# EAGLE board grue (EAGLE 8.6.0)
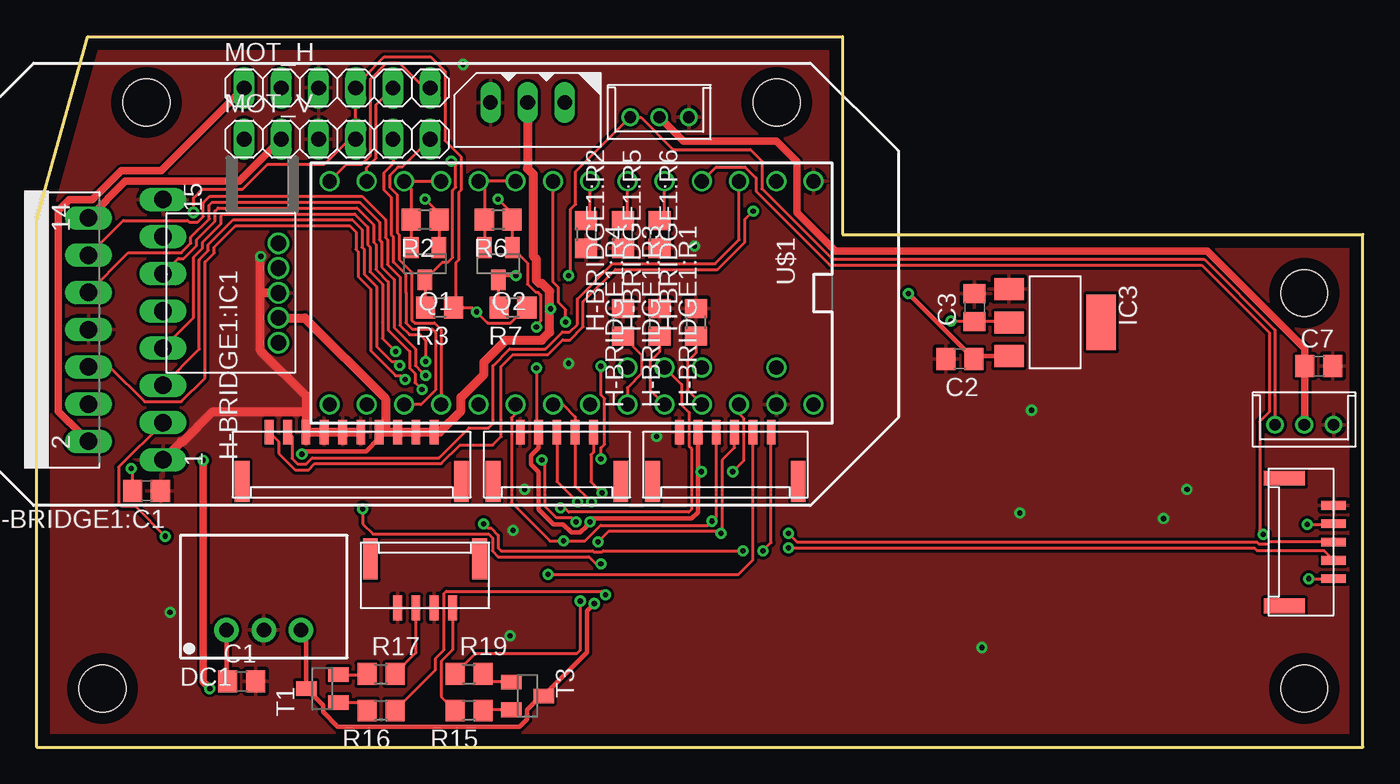
[diagram p0: board, top side]
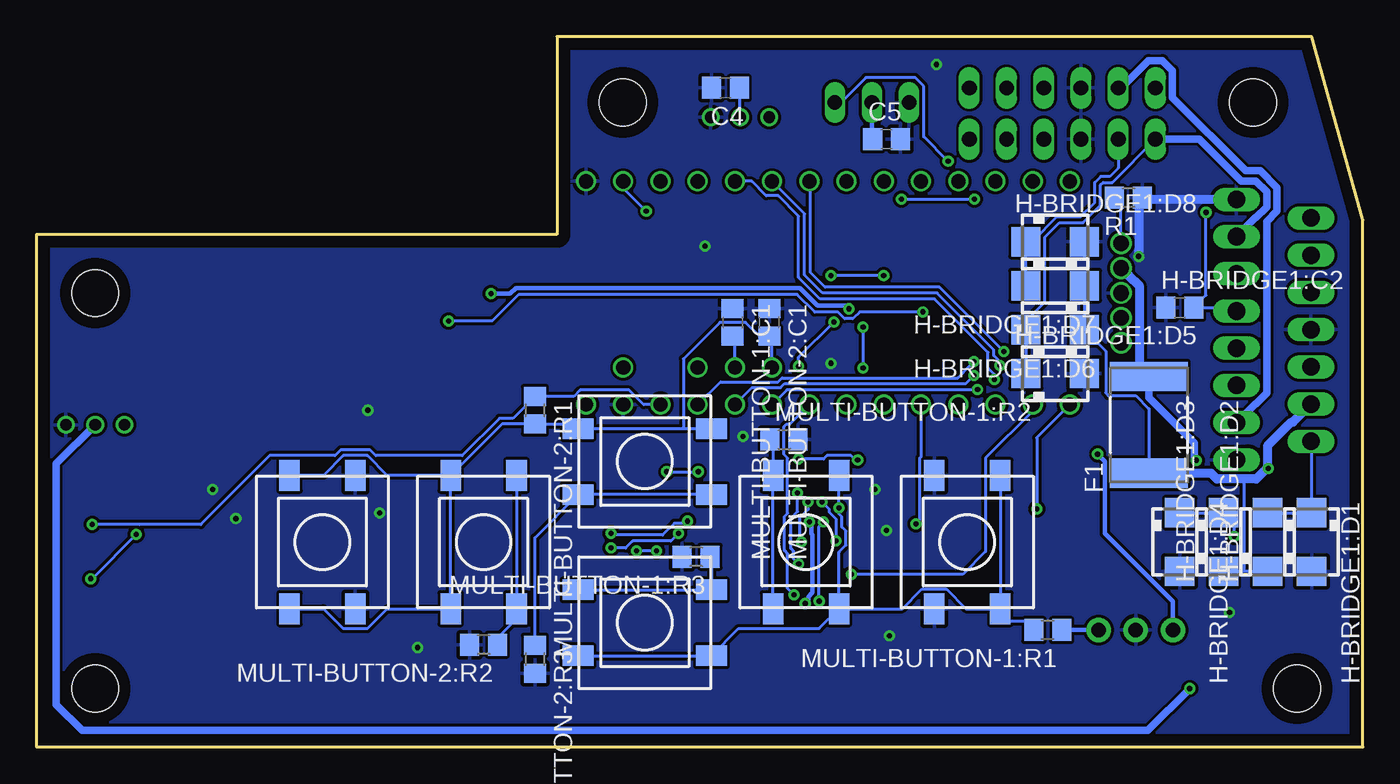
[diagram p1: board, bottom side, seen from below]

Size 90.5 x 48.5 mm. Coordinates in mm from the lower left corner, seen from the top.
Outline: 0,0 90.5,0 90.5,35 55,35 55,48.5 3.5,48.5 0,36 0,0
Copper layers (1*16): Top 0.035mm / dielectric 1.5mm / Bottom 0.035mm
Design rules "sg_default *": minimum track width 0.2mm, minimum drill 0.35mm, track to track 0.2mm, track to pad 0.2mm, pad to pad 0.2mm, via to via 0.2mm, smd to smd 0.2mm, copper to edge 0.8mm, drill to drill 0.2mm, minimum pad ring 0.2mm, minimum via ring 8mil, stop-mask expansion 4mil, vias tented up to drill 1mm, thermal gap 10mil
Holes 3.2 mm at 4.5,4 7.5,44 50.5,44 86.5,4 86.5,31
tKeepout: area 4.5,41 to 10.5,47; area 47.5,41 to 53.5,47; area 1.5,1 to 7.5,7; area 83.5,28 to 89.5,34; area 83.5,1 to 89.5,7
bKeepout: area 3,39.5 to 12,48.5; area 46,39.5 to 55,48.5; area 0,-0.5 to 9,8.5; area 82,-0.5 to 91,8.5; area 82,26.5 to 91,35.5

## Footprints (pad centres in the part's own frame; a part is rotated, then mirrored left to right if it is on the bottom)
DYNAMIXEL_AX_1X03 = drill 1 long: DATA 2.54,0; DYN_VCC 0,0; GND -2.54,0
C0805 = smd 1.3 x 1.5: 1 -0.95,0; 2 0.95,0
SIP3 = drill 1 pad 1.676: 1 -2.54,0; 2 0,0; 3 2.54,0
DC-DC-CONVERTER = drill 1.07 pad 1.47: GND 0,0; ON-OFF -3.4,0; TRIM+ 3.4,0; VIN -1.7,0; VOUT 1.7,0
MF-LSMF300 = smd 2 x 5.3: 1 -3.3,0; 2 3.3,0
GH-10-V = smd 0.6 x 1.7: 1 -5.625,2.5; 2 -4.375,2.5; 3 -3.125,2.5; 4 -1.875,2.5; 5 -0.625,2.5; 6 0.625,2.5; 7 1.875,2.5; 8 3.125,2.5; 9 4.375,2.5; 10 5.625,2.5 | smd 1 x 2.8: CASE0 7.475,-0.85; CASE1 -7.475,-0.85
GH-04-V = smd 0.6 x 1.7: 1 -1.875,2.5; 2 -0.625,2.5; 3 0.625,2.5; 4 1.875,2.5 | smd 1 x 2.8: CASE0 3.725,-0.85; CASE1 -3.725,-0.85
SMA = smd 2 x 2: A 2,0; C -2,0
MULTIWATT-15 = drill 1.2 long: 1 -8.89,-7.62; 2 -7.62,-2.54; 3 -6.35,-7.62; 4 -5.08,-2.54; 5 -3.81,-7.62; 6 -2.54,-2.54; 7 -1.27,-7.62; 8 0,-2.54; 9 1.27,-7.62; 10 2.54,-2.54; 11 3.81,-7.62; 12 5.08,-2.54; 13 6.35,-7.62; 14 7.62,-2.54; 15 8.89,-7.62
R0805 = smd 1.3 x 1.5: 1 -0.95,0; 2 0.95,0
SOT223 = smd 1.499 x 2.007: 1 -2.261,-3.15; 2 0.025,-3.15; 3 2.311,-3.15 | smd 3.81 x 2.007: 4 0,3.15
1X06 = drill 1.016 long: 1 -6.35,0; 2 -3.81,0; 3 -1.27,0; 4 1.27,0; 5 3.81,0; 6 6.35,0
PUSH-BUTTON = smd 1.4 x 2.1: 1 2.25,4.55; 2 2.25,-4.55; 3 -2.25,4.55; 4 -2.25,-4.55
SOT23 = smd 1 x 1.4: 1 -0.95,-1.1; 2 0.95,-1.1; 3 0,1.1
SOT23-BEC = smd 1 x 1.4: B -0.95,-1.1; C 0,1.1; E 0.95,-1.1
GH-05-V = smd 0.6 x 1.7: 1 -2.5,2.5; 2 -1.25,2.5; 3 0,2.5; 4 1.25,2.5; 5 2.5,2.5 | smd 1 x 2.8: CASE0 4.35,-0.85; CASE1 -4.35,-0.85
GH-06-V = smd 0.6 x 1.7: 1 -3.125,2.5; 2 -1.875,2.5; 3 -0.625,2.5; 4 0.625,2.5; 5 1.875,2.5; 6 3.125,2.5 | smd 1 x 2.8: CASE0 4.975,-0.85; CASE1 -4.975,-0.85
TEENSY_3.0-3.2&LC_DIL+4 = drill 0.965: 0 -7.62,13.97; 1 -7.62,11.43; 2 -7.62,8.89; 3 -7.62,6.35; 3.3V 7.62,11.43; 4 -7.62,3.81; 5 -7.62,1.27; 6 -7.62,-1.27; 7 -7.62,-3.81; 8 -7.62,-6.35; 9 -7.62,-8.89; 10 -7.62,-11.43; 11 -7.62,-13.97; 12 -7.62,-16.51; 13 7.62,-16.51; 14/A0 7.62,-13.97; 15/A1 7.62,-11.43; 16/A2 7.62,-8.89; 17/A3 7.62,-6.35; 18/A4 7.62,-3.81; 19/A5 7.62,-1.27; 20/A6 7.62,1.27; 21/A7 7.62,3.81; 22/A8 7.62,6.35; 23/A9 7.62,8.89; A10 5.08,6.35; A11 5.08,3.81; AGND 7.62,13.97; AREF 5.08,8.89; GND -7.62,16.51; VIN 7.62,16.51; VUSB 5.08,13.97
DYNAMIXEL_XL_1X03 = drill 0.8: DATA 2,0; GND -2,0; VCC 0,0

## Placement (x,y rotation side)
AX12_G  DYNAMIXEL-1X03AX  [DYNAMIXEL_AX_1X03]  33.5,44 0 top
C1  10µF  [C0805]  14,4.5 0 top
C2  10µF  [C0805]  63,26.5 180 top
C3  22µF  [C0805]  64,30 90 top
C4  1µF  [C0805]  43.5,45 180 bottom
C5  1µF  [C0805]  32.5,41.5 0 bottom
C7  1µF  [C0805]  87.5,26 0 top
DC1  R-78C3.3-1.0  [SIP3]  15.5,8 0 top
DC-DC-6V  DC-DC-CONVERTER  [DC-DC-CONVERTER]  16.5,31 90 top
F1  MF-LSMF300  [MF-LSMF300]  14.6,22 90 bottom
GRUE  JST-10  [GH-10-V]  21.5,19 0 top
GYRO  JST-04GH-V  [GH-04-V]  26.5,12 180 top
H-BRIDGE1:C1  100nF  [C0805]  7.5,17.5 180 top
H-BRIDGE1:C2  100nF  [C0805]  12.5,30 0 bottom
H-BRIDGE1:D1  S1M  [SMA]  3.5,14 270 bottom
H-BRIDGE1:D2  S1M  [SMA]  6.5,14 90 bottom
H-BRIDGE1:D3  S1M  [SMA]  9.5,14 90 bottom
H-BRIDGE1:D4  S1M  [SMA]  12.5,14 270 bottom
H-BRIDGE1:D5  S1M  [SMA]  21,25.5 0 bottom
H-BRIDGE1:D6  S1M  [SMA]  21,28.5 180 bottom
H-BRIDGE1:D7  S1M  [SMA]  21,31.5 180 bottom
H-BRIDGE1:D8  S1M  [SMA]  21,34.5 0 bottom
H-BRIDGE1:IC1  L298  [MULTIWATT-15]  1,28.5 90 top
H-BRIDGE1:R1  10k  [R0805]  42.5,35 270 top
H-BRIDGE1:R2  10k  [R0805]  40,29 90 top
H-BRIDGE1:R3  10k  [R0805]  40,35 270 top
H-BRIDGE1:R4  10k  [R0805]  37.5,35 270 top
H-BRIDGE1:R5  10k  [R0805]  42.5,29 90 top
H-BRIDGE1:R6  10k  [R0805]  45,29 90 top
IC3  REG1117  [SOT223]  69.5,29 270 top
MOT_H  [1X06]  20.5,45 0 top
MOT_V  [1X06]  20.5,41.5 0 top
MULTI-BUTTON-1:C1  1µF  [C0805]  43,29 270 bottom
MULTI-BUTTON-1:R1  4k7  [R0805]  21.5,8 180 bottom
MULTI-BUTTON-1:R2  2k2  [R0805]  39.5,21 0 bottom
MULTI-BUTTON-1:R3  10k  [R0805]  45.5,13 180 bottom
MULTI-BUTTON-1:U1  PUSH-BUTTON  [PUSH-BUTTON]  49,8.5 270 bottom
MULTI-BUTTON-1:U2  PUSH-BUTTON  [PUSH-BUTTON]  38,14 0 bottom
MULTI-BUTTON-1:U3  PUSH-BUTTON  [PUSH-BUTTON]  27,14 0 bottom
MULTI-BUTTON-2:C1  1µF  [C0805]  40.5,29 270 bottom
MULTI-BUTTON-2:R1  4k7  [R0805]  56.5,23 270 bottom
MULTI-BUTTON-2:R2  2k2  [R0805]  60,7 180 bottom
MULTI-BUTTON-2:R3  10k  [R0805]  56.5,6 270 bottom
MULTI-BUTTON-2:U1  PUSH-BUTTON  [PUSH-BUTTON]  49,19.5 90 bottom
MULTI-BUTTON-2:U2  PUSH-BUTTON  [PUSH-BUTTON]  60,14 180 bottom
MULTI-BUTTON-2:U3  PUSH-BUTTON  [PUSH-BUTTON]  71,14 180 bottom
Q1  BSS138  [SOT23]  26.5,33 180 top
Q2  BSS138  [SOT23]  31.5,33 180 top
R1  220  [R0805]  16,37.5 180 bottom
R2  10k  [R0805]  26.5,36 180 top
R3  10k  [R0805]  27.5,30 180 top
R6  10k  [R0805]  31.5,36 180 top
R7  10k  [R0805]  32.5,30 180 top
R15  0  [R0805]  29.5,2.5 180 top
R16  270  [R0805]  23.5,2.5 180 top
R17  0  [R0805]  23.5,5 0 top
R19  270  [R0805]  29.5,5 0 top
T1  [SOT23-BEC]  19.5,4 90 top
T3  [SOT23-BEC]  33.5,3.5 270 top
TOF_LP_D_AND_DISPLAY  JST-05  [GH-05-V]  35.5,19 0 top
TOF_LP_G  JST-05  [GH-05-V]  86,14 270 top
TOF_PINCE  JST-06  [GH-06-V]  47,19 0 top
U$1  TEENSY_3.1-3.2_DIL+4  [TEENSY_3.0-3.2&LC_DIL+4]  36.5,31 270 top
XL320_G  DYNAMIXEL-1X03XL  [DYNAMIXEL_XL_1X03]  86.5,22 180 top
XL320_G1  DYNAMIXEL-1X03XL  [DYNAMIXEL_XL_1X03]  42.5,43 180 top

## Library data of the parts
AX12_G XL320_G XL320_G1 = 1NTech_pinhead
C1-C5 C7 H-BRIDGE1:C1 H-BRIDGE1:C2 H-BRIDGE1:R1-H-BRIDGE1:R6 MULTI-BUTTON-1:C1 MULTI-BUTTON-1:R1-MULTI-BUTTON-1:R3 MULTI-BUTTON-2:C1 MULTI-BUTTON-2:R1-MULTI-BUTTON-2:R3 R1-R3 R6 R7 R15-R17 R19 = resistor
DC1 = dc-dc-converter
DC-DC-6V = dc-dc-converter-6v; RS: 715-8575
F1 = polyswitch; RS: 817-1652
GRUE GYRO TOF_LP_D_AND_DISPLAY TOF_LP_G TOF_PINCE = con-jst
H-BRIDGE1:D1-H-BRIDGE1:D8 = diode; RS: 872-2874
H-BRIDGE1:IC1 = st-microelectronics; MPN: L298N; OC_FARNELL: 1589425; OC_NEWARK: 32M1527
IC3 = burr-brown; MPN: REG1117; OC_FARNELL: 1097566; OC_NEWARK: 14P6981; RS: 885-5432
MOT_H MOT_V = pinhead
MULTI-BUTTON-1:U1-MULTI-BUTTON-1:U3 MULTI-BUTTON-2:U1-MULTI-BUTTON-2:U3 = push-button; H: 4.3mm; RS: 479-1491
Q1 Q2 = transistor-small-signal
T1 T3 = transistor; RS: 781-4272
U$1 = Teensy_libSG

## Nets
+3V3: DC1.3 MULTI-BUTTON-1:R1.1 MULTI-BUTTON-2:R1.1 Q1.1 Q2.1 R2.1 R6.1 T1.C T3.C TOF_LP_D_AND_DISPLAY.2 TOF_LP_G.2 TOF_PINCE.2 U$1.3.3V
+5V: C3.1 H-BRIDGE1:C2.2 H-BRIDGE1:IC1.9 IC3.2 MOT_H.4 MOT_V.4 R3.1 R7.1
+6V: C4.1 C7.1 DC-DC-6V.VOUT F1.2 XL320_G1.VCC XL320_G.VCC
+12V: AX12_G.DYN_VCC C1.1 C2.1 C5.1 DC1.1 DC-DC-6V.VIN GRUE.7 GRUE.8 GRUE.9 GRUE.10 IC3.3
AREF: U$1.AREF
DEL_GYRO_1: GYRO.1 R15.2
DEL_GYRO_1_PWM: R19.1 U$1.6
DEL_GYRO_2: GYRO.3 R17.2
DEL_GYRO_2_PWM: R16.1 U$1.20/A6
GND: AX12_G.GND C1.2 C2.2 C3.2 C4.2 C5.2 C7.2 DC1.2 DC-DC-6V.GND GRUE.3 GRUE.4 GRUE.5 GRUE.6 GYRO.2 GYRO.4 H-BRIDGE1:C1.1 H-BRIDGE1:C2.1 H-BRIDGE1:D1.A H-BRIDGE1:D4.A H-BRIDGE1:D5.A H-BRIDGE1:D8.A H-BRIDGE1:IC1.1 H-BRIDGE1:IC1.8 H-BRIDGE1:IC1.15 H-BRIDGE1:R1.2 H-BRIDGE1:R2.2 H-BRIDGE1:R3.2 H-BRIDGE1:R4.2 H-BRIDGE1:R5.2 H-BRIDGE1:R6.2 IC3.1 MOT_H.3 MOT_V.3 MULTI-BUTTON-1:C1.1 MULTI-BUTTON-1:R2.2 MULTI-BUTTON-1:R3.2 MULTI-BUTTON-1:U3.3 MULTI-BUTTON-1:U3.4 MULTI-BUTTON-2:C1.1 MULTI-BUTTON-2:R2.2 MULTI-BUTTON-2:R3.2 MULTI-BUTTON-2:U3.3 MULTI-BUTTON-2:U3.4 R1.1 TOF_LP_D_AND_DISPLAY.1 TOF_LP_G.1 TOF_PINCE.1 U$1.AGND U$1.GND XL320_G1.GND XL320_G.GND
GRUE_SERIAL_MISO: GRUE.2 U$1.1
GRUE_SERIAL_MOSI: GRUE.1 U$1.0
MOT_H_EN: H-BRIDGE1:IC1.6 H-BRIDGE1:R1.1 U$1.3
MOT_H_ENC_A: MOT_H.5 U$1.11
MOT_H_ENC_B: MOT_H.6 U$1.12
MOT_H_IN1: H-BRIDGE1:IC1.5 H-BRIDGE1:R3.1 U$1.4
MOT_H_IN2: H-BRIDGE1:IC1.7 H-BRIDGE1:R4.1 U$1.5
MOT_H_OUT+: H-BRIDGE1:D1.C H-BRIDGE1:D2.A H-BRIDGE1:IC1.2 MOT_H.1
MOT_H_OUT-: H-BRIDGE1:D3.A H-BRIDGE1:D4.C H-BRIDGE1:IC1.3 MOT_H.2
MOT_V_EN: H-BRIDGE1:IC1.11 H-BRIDGE1:R2.1 U$1.21/A7
MOT_V_ENC_A: MOT_V.5 U$1.15/A1
MOT_V_ENC_B: MOT_V.6 U$1.16/A2
MOT_V_IN1: H-BRIDGE1:IC1.10 H-BRIDGE1:R5.1 U$1.22/A8
MOT_V_IN2: H-BRIDGE1:IC1.12 H-BRIDGE1:R6.1 U$1.23/A9
MOT_V_OUT+: H-BRIDGE1:D5.C H-BRIDGE1:D6.A H-BRIDGE1:IC1.13 MOT_V.1
MOT_V_OUT-: H-BRIDGE1:D7.A H-BRIDGE1:D8.C H-BRIDGE1:IC1.14 MOT_V.2
MULTI-BUTTON-1:N$3: MULTI-BUTTON-1:R2.1 MULTI-BUTTON-1:U2.3 MULTI-BUTTON-1:U2.4
MULTI-BUTTON-1:N$4: MULTI-BUTTON-1:R3.1 MULTI-BUTTON-1:U1.3 MULTI-BUTTON-1:U1.4
MULTI-BUTTON-2:N$3: MULTI-BUTTON-2:R2.1 MULTI-BUTTON-2:U2.3 MULTI-BUTTON-2:U2.4
MULTI-BUTTON-2:N$4: MULTI-BUTTON-2:R3.1 MULTI-BUTTON-2:U1.3 MULTI-BUTTON-2:U1.4
N$1: MULTI-BUTTON-1:C1.2 MULTI-BUTTON-1:R1.2 MULTI-BUTTON-1:U1.1 MULTI-BUTTON-1:U1.2 MULTI-BUTTON-1:U2.1 MULTI-BUTTON-1:U2.2 MULTI-BUTTON-1:U3.1 MULTI-BUTTON-1:U3.2 U$1.A10
N$2: MULTI-BUTTON-2:C1.2 MULTI-BUTTON-2:R1.2 MULTI-BUTTON-2:U1.1 MULTI-BUTTON-2:U1.2 MULTI-BUTTON-2:U2.1 MULTI-BUTTON-2:U2.2 MULTI-BUTTON-2:U3.1 MULTI-BUTTON-2:U3.2 U$1.A11
N$3: DC-DC-6V.TRIM+ R1.2
N$4: F1.1 H-BRIDGE1:C1.2 H-BRIDGE1:D2.C H-BRIDGE1:D3.C H-BRIDGE1:D6.C H-BRIDGE1:D7.C H-BRIDGE1:IC1.4
N$17: R15.1 T3.E
N$18: R19.2 T3.B
N$21: R17.1 T1.E
N$22: R16.2 T1.B
SCL: TOF_LP_D_AND_DISPLAY.4 TOF_LP_G.4 TOF_PINCE.4 U$1.19/A5
SDA: TOF_LP_D_AND_DISPLAY.3 TOF_LP_G.3 TOF_PINCE.3 U$1.18/A4
SERIAL_AX12: Q1.2 R2.2 U$1.9 U$1.10
SERIAL_AX12_5V: AX12_G.DATA Q1.3 R3.2
SERIAL_XL320: Q2.2 R6.2 U$1.7 U$1.8
SERIAL_XL320_5V: Q2.3 R7.2 XL320_G1.DATA XL320_G.DATA
TOF_LP_D: TOF_LP_D_AND_DISPLAY.5 U$1.13
TOF_LP_G: TOF_LP_G.5 U$1.2
TOF_PINCE_EXT: TOF_PINCE.6 U$1.17/A3
TOF_PINCE_INT: TOF_PINCE.5 U$1.14/A0
VIN: U$1.VIN
VUSB: U$1.VUSB

## Tracks (layer width: path | path; a pad name or v marks a point on that pad's centre or on a via)
+3V3  (via drill 0.35)
  Top 0.2: Q1.1 R2.1 27.45,36.45 v26.5,37.4 | U$1.3.3V 47.93,22.77 48.23,22.47 48.23,19.52 v47.5,18.8 | 45.12,19.57 45.12,19.6 | v86.7,15.2 88.45,15.2 TOF_LP_G.2 | v34.1,28.67 34.1,28.8 34.4,29.1 34.4,30.87 34.22,31.05 34.05,31.05 33.5,31.6 33.5,33.05 Q2.1 R6.1 32.45,36.45 v31.5,37.4 | v34.1,25.89 34.1,21.65 TOF_LP_D_AND_DISPLAY.2 | v45.35,18.8 45.12,18.8
  Top 0.3: DC1.3 18.4,7.64 T1.C 19.55,2.85 19.55,2.4 20.55,1.4 32.95,1.4 33.45,1.91 33.45,2.55 34.5,3.6 | 34.5,3.6 T3.C 37.56,6.46 37.56,9.3 v38.06,9.8 | 34.5,3.6 34.25,3.85 | TOF_PINCE.2 45.12,19.6 45.12,18.8 45.12,16.02 44.7,15.6 37.98,15.6 v37.75,15.37 37.52,15.14 37.52,15.07 37.1,14.64 36.49,14.64 35.94,15.2 35.28,15.2 34.25,16.23 34.25,18.79 33.74,19.3 33.74,19.9 34.25,20.41 TOF_LP_D_AND_DISPLAY.2
  Bottom 0.2: U$1.3.3V 49.08,23.38 50.06,24.36 53.42,24.36 53.83,23.95 MULTI-BUTTON-2:R1.1 58,22.45 58.92,22.45 61.47,19.9 67.36,19.9 67.76,20.3 69.74,20.3 70.14,19.9 74.6,19.9 79.3,15.2 83.5,15.2 v86.7,15.2 | v34.1,28.67 v34.1,25.89 | v31.5,37.4 v26.5,37.4 | v47.5,18.8 v45.35,18.8
  Bottom 0.3: DC1.3 MULTI-BUTTON-1:R1.1 | v38.06,9.8 37.83,10.03 37.83,10.27 37.55,10.55 37.55,14.49 37.63,14.57 37.63,15.25 v37.75,15.37
+5V  (via drill 0.35)
  Top 0.2: R3.1 28.7,30 | 28.7,30 29.73,30 v30.01,29.71 30.78,28.95 32.32,28.95 33.37,30 R7.1 | v10.7,36.51 10.7,37.49 11.3,38.09 14.06,38.09 15.75,39.78 19.65,39.78 21.36,41.5 MOT_V.4 MOT_H.4 22.38,45.61 22.38,45.77 23.73,47.12 26.87,47.12 27.86,46.13 27.86,41.4 28.99,40.27 28.99,38.05 28.8,37.85 28.8,33.26 28.59,33.05 28.59,30.11 28.7,30 | IC3.2 66.28,29.05 C3.1 63.96,29.09 v62.39,29.09
  Bottom 0.2: H-BRIDGE1:IC1.9 8.85,30 H-BRIDGE1:C2.2 10.7,30.85 v10.7,36.51 | v30.01,29.71 34.33,29.71 34.8,29.24 35.36,29.24 35.82,29.7 37.4,29.7 38.6,30.9 57.6,30.9 59.41,29.09 v62.39,29.09
+6V  (via drill 0.35)
  Top 0.5: XL320_G1.VCC 44.15,41.35 50.5,41.35 51.88,39.97 51.88,36.5 54.52,33.85 79.9,33.85 86.55,27.2 C7.1 86.55,22.05 XL320_G.VCC | v11.37,19.58 11.37,4.45 v11.82,4
  Bottom 0.2: XL320_G1.VCC 42.5,44.95 C4.1
  Bottom 0.5: F1.2 14.6,23.88 11.5,20.78 11.5,19.71 v11.37,19.58 | v11.82,4 14.67,1.15 87.4,1.15 89.15,2.9 89.15,19.35 XL320_G.VCC
  Bottom 0.61: DC-DC-6V.VOUT 16.04,32.24 15.99,32.24 15.26,31.51 15.26,25.96 F1.2
+12V  (via drill 0.35)
  Top 0.3: IC3.3 64.14,26.69 C2.1 v59.49,30.96 | DC1.1 12.96,4.59 C1.1 | 35.01,30 v35.08,29.93 v35.08,29.92 | GRUE.7 23.38,21.11 22.47,20.2 18.3,20.2 v18.1,20
  Top 0.61: GRUE.7 23.8,21.5 | 23.8,21.5 GRUE.8 GRUE.9 GRUE.10 27.5,21.5 28.96,22.96 28.96,23.87 30.53,25.44 30.53,26.28 32.03,27.79 34.47,27.79 35.01,28.33 35.01,30 35.01,31.12 34.48,31.66 34.31,31.66 34.1,31.86 34.1,33.3 33.88,33.53 33.88,39.11 33.5,39.49 AX12_G.DYN_VCC | DC-DC-6V.VIN 18.29,29.3 23.8,23.79 23.8,21.5
  Bottom 0.3: AX12_G.DYN_VCC 33.5,41.55 C5.1 | v35.08,29.92 35.31,30.15 37.22,30.15 38.42,31.35 57.79,31.35 58.19,30.95 v59.48,30.95 v59.49,30.96 | v18.1,20 17.6,19.5 17.6,14.61 12.96,9.96 DC1.1
DEL_GYRO_1
  Top 0.2: GYRO.1 28.38,6.65 27.6,5.87 27.6,3.45 R15.2
DEL_GYRO_1_PWM  (via drill 0.35)
  Top 0.2: R19.1 29.95,6.4 36.86,6.4 37.11,6.64 v37.11,9.96 v37.1,9.97 | U$1.6 35.23,31.75 35.61,31.38 35.61,30.35 36.1,29.86 v36.1,29.02 | v36.8,15.37 36.52,15.65 35.47,15.65 34.7,16.42 34.7,19.37 v34.47,19.6 | v38.5,19.67 38.5,20.43 38.75,20.68 38.75,23.79 38.5,24.04 v38.5,26
  Bottom 0.2: v36.8,15.37 37.07,15.09 37.1,15.06 v37.1,9.97 | v34.47,19.6 34.63,19.6 34.93,19.9 36.57,19.9 36.8,19.67 v38.5,19.67 | v38.5,26 38.5,26.62 v36.1,29.02
DEL_GYRO_2
  Top 0.2: GYRO.3 25.88,6.42 R17.2
DEL_GYRO_2_PWM  (via drill 0.35)
  Top 0.2: R16.1 27.2,5.25 27.2,6.04 27.77,6.62 27.77,10.47 27.95,10.65 38.58,10.65 v38.83,10.4
  Bottom 0.2: U$1.20/A6 39.1,22.05 39.32,22.05 39.5,21.87 39.5,19.97 39.25,19.72 39.25,15.96 39.47,15.74 39.47,13.43 39.25,13.21 39.25,10.82 v38.83,10.4
GND  (via drill 0.35)
  Top 0.61: 18.38,22.9 18.38,23.97 15.26,27.09 15.26,31 | 18.38,22.9 GRUE.3 GRUE.4 GRUE.5 GRUE.6 | H-BRIDGE1:IC1.1 9.86,20.84 9.96,20.84 12.02,22.9 18.38,22.9 | DC-DC-6V.GND 15.26,31 | 15.26,31 15.26,33.46 v15.3,33.5
  Bottom 0.61: v15.3,33.5 15.3,33.85 15.26,33.89 15.26,37.29 R1.1 14.94,37.39 H-BRIDGE1:IC1.15
  other vias: 44.9,34.2 32.3,7.6 67.9,23 64.5,6.8 67.1,16 29.1,46.6 76.9,15.6 78.5,17.6 33.3,17.6 32.5,14.8 42.3,21.2 36.3,26.2 9.1,9.2
  pour Top: 0,48.5 90.5,48.5 90.5,0 0,0
  pour Bottom: 0,48.5 90.5,48.5 90.5,0 0,0
GRUE_SERIAL_MISO
  Top 0.2: GRUE.2 17.42,21.2 17.42,19.72 17.82,19.32 18.38,19.32 18.81,19.75 27.45,19.75 29.5,21.8 30.83,21.8 31.13,22.1 31.13,26.03 32.28,27.18 34.72,27.18 35.88,28.34 36.38,28.34 36.9,28.86 36.9,30.6 39.3,33 46.3,33 47.93,34.63 U$1.1
GRUE_SERIAL_MOSI  (via drill 0.35)
  Top 0.2: GRUE.1 16.52,20.85 16.52,20.05 17.65,18.92 18.55,18.92 18.98,19.35 27.62,19.35 28.88,20.62 31.12,20.62 31.7,21.2 31.7,25.98 32.5,26.78 34.88,26.78 35.9,27.8 36.4,27.8 37.3,28.7 37.3,30.4 39.5,32.6 46.47,32.6 48.33,34.46 48.33,36.03 v48.9,36.6
  Bottom 0.2: v48.9,36.6 50.47,38.17 U$1.0
MOT_H_EN  (via drill 0.35)
  Top 0.2: H-BRIDGE1:R1.1 42.85,36.3 U$1.3 | H-BRIDGE1:IC1.6 4.99,25.96 7.36,23.59 9.88,23.59 11.5,25.21 11.5,33.11 12.12,33.73 12.12,34.14 13.58,35.6 21.37,35.6 21.8,35.17 21.8,33.97 21.95,33.82 21.95,32.12 22.8,31.27 22.8,27.06 24.49,25.37 24.86,25.37 v25.14,25.09
  Bottom 0.2: v25.14,25.09 25.14,25.45 25.58,25.89 25.58,26.95 29.23,30.6 37.03,30.6 38.5,32.07 38.5,36.24 39.89,37.64 40.72,37.64 41.7,38.62 U$1.3
MOT_H_ENC_A
  Top 0.2: U$1.11 22.53,39.56 23.18,40.21 23.18,43.87 MOT_H.5
MOT_H_ENC_B
  Top 0.2: U$1.12 21.15,39.78 22.19,39.78 22.78,40.37 22.78,41.6 22.78,41.8 22.78,45.6 23.89,46.72 24.73,46.72 26.44,45 MOT_H.6
MOT_H_IN1  (via drill 0.35)
  Top 0.2: H-BRIDGE1:R3.1 40.31,36.26 U$1.4 | H-BRIDGE1:IC1.5 11.1,27.17 11.1,33.28 11.72,33.9 11.72,34.3 13.41,36 21.54,36 22.2,35.34 22.2,34.13 22.35,33.98 22.35,32.28 23.2,31.43 23.2,27.34 24.22,26.32 24.5,26.32 v24.77,26.05
  Bottom 0.2: v24.77,26.05 24.77,26.32 25.18,26.72 25.18,27.11 29.07,31 36.87,31 38.1,32.23 38.1,36.41 U$1.4
MOT_H_IN2  (via drill 0.35)
  Top 0.2: H-BRIDGE1:R4.1 37.77,36.22 U$1.5 | H-BRIDGE1:IC1.7 10.7,29.31 10.7,33.44 11.32,34.06 11.32,34.47 12.58,35.73 12.58,36.28 12.7,36.4 21.7,36.4 22.6,35.5 22.6,34.3 22.75,34.15 22.75,32.45 23.6,31.6 23.6,29 23.6,27.9 v24.5,27
  Bottom 0.2: v24.5,27 28.9,31.4 36.7,31.4 37.7,32.4 37.7,38.55 U$1.5
MOT_H_OUT+
  Top 0.5: MOT_H.1 8.49,39.34 5.77,39.34 3.8,37.37 2.22,37.37 1.49,36.64 1.49,22.9 2.22,22.17 2.25,22.17 H-BRIDGE1:IC1.2
  Bottom 0.2: H-BRIDGE1:D2.A H-BRIDGE1:D1.C 3.5,20.84 H-BRIDGE1:IC1.2
MOT_H_OUT-  (via drill 0.35)
  Top 0.2: H-BRIDGE1:IC1.3 8.62,22.13 5.6,19.11 5.6,16.63 5.78,16.45 6.73,16.45 v8.78,14.4
  Bottom 0.2: H-BRIDGE1:D4.C H-BRIDGE1:D3.A 8.78,15.28 v8.78,14.4
  Bottom 0.5: MOT_H.2 16.5,45 14.63,46.87 13.67,46.87 12.99,46.19 12.99,44.33 8,39.34 7.01,39.34 5.87,38.2 5.87,36.58 6.57,35.88 6.57,24.17 7.3,23.44 7.33,23.44 H-BRIDGE1:IC1.3
MOT_V_EN  (via drill 0.35)
  Top 0.2: U$1.21/A7 40.31,24.53 41.29,25.51 41.29,26.76 H-BRIDGE1:R2.1 | H-BRIDGE1:IC1.11 9.66,33.35 10.04,33.35 10.92,34.23 10.92,34.64 12.18,35.9 12.18,36.6 12.38,36.8 21.87,36.8 23,35.67 23,34.46 23.15,34.31 23.15,32.61 24,31.76 24,28.46 25.45,27.01 25.45,25.88 25.82,25.52 25.82,24.89 v26.29,24.41
  Bottom 0.2: U$1.21/A7 39.3,24.39 | 39.3,24.39 39.3,24.4 | 39.3,24.39 39.28,24.41 v26.29,24.41
MOT_V_ENC_A
  Top 0.2: MOT_V.5 24.31,39.81 23.69,39.19 23.69,38.05 24.2,37.53 24.2,34.96 24.35,34.81 24.35,33.11 25.2,32.26 25.2,31.04 25.2,31 25.2,28.96 25.61,28.55 26.98,28.55 27.21,28.32 27.21,24.37 26.22,23.38 U$1.15/A1
MOT_V_ENC_B
  Top 0.2: MOT_V.6 24.95,39.6 24.66,39.6 24.09,39.03 24.09,38.21 24.6,37.7 24.6,35.13 24.75,34.98 24.75,33.28 25.6,32.43 25.6,29.13 25.78,28.95 27.15,28.95 27.61,28.49 U$1.16/A2
MOT_V_IN1  (via drill 0.35)
  Top 0.2: H-BRIDGE1:R5.1 42.5,26.96 41.87,26.33 41.87,24.36 U$1.22/A8 | H-BRIDGE1:IC1.10 6.25,33.75 9.88,33.75 10.52,34.39 10.52,34.8 11.78,36.06 11.78,37 11.98,37.2 22.03,37.2 23.4,35.83 23.4,34.63 23.55,34.48 23.55,32.78 24.4,31.93 24.4,28.63 25.85,27.18 25.85,26.04 26.25,25.64 v26.53,25.37
  Bottom 0.2: U$1.22/A8 41.69,24.54 39.74,24.54 39.47,24.81 27.09,24.81 v26.53,25.37
MOT_V_IN2  (via drill 0.35)
  Top 0.2: H-BRIDGE1:R6.1 45,26.92 44.41,26.33 44.41,24.36 U$1.23/A9 | H-BRIDGE1:IC1.12 5.91,35.95 10.3,35.95 10.42,35.83 10.98,35.83 11.38,36.23 11.38,37.17 11.81,37.6 22.2,37.6 23.8,36 23.8,34.79 23.95,34.64 23.95,32.94 24.8,32.09 24.8,28.79 25.44,28.15 26.15,28.15 26.53,27.77 v26.53,26.32
  Bottom 0.2: U$1.23/A9 43.83,24.94 39.9,24.94 39.63,25.21 27.65,25.21 26.81,26.04 v26.53,26.32
MOT_V_OUT+
  Bottom 0.2: H-BRIDGE1:D5.C H-BRIDGE1:D6.A 23,29.08 21.7,30.38 21.7,34.8 20.7,35.8 19.1,35.8 17.9,37 17.9,38.37 17.72,38.55 17.1,38.55 MOT_V.1
  Bottom 0.5: H-BRIDGE1:IC1.13 7.33,36.14 7.3,36.14 6.57,36.87 6.57,37.91 7.3,38.64 8.29,38.64 11.15,41.5 MOT_V.1
MOT_V_OUT-
  Top 0.5: H-BRIDGE1:IC1.14 6.06,38.64 13.83,38.64 MOT_V.2
  Bottom 0.2: H-BRIDGE1:D7.A H-BRIDGE1:D8.C 22.57,34.5 20.87,36.2 19.27,36.2 18.3,37.17 18.3,38.54 17.89,38.95 17.27,38.95 16.69,39.53 MOT_V.2
MULTI-BUTTON-1:N$3
  Bottom 0.2: MULTI-BUTTON-1:R2.1 40.25,20.8 MULTI-BUTTON-1:U2.3 MULTI-BUTTON-1:U2.4
MULTI-BUTTON-1:N$4
  Bottom 0.2: MULTI-BUTTON-1:R3.1 44.45,12.9 MULTI-BUTTON-1:U1.3 MULTI-BUTTON-1:U1.4
MULTI-BUTTON-2:N$3
  Bottom 0.2: MULTI-BUTTON-2:R2.1 59.05,7.45 57.75,8.75 MULTI-BUTTON-2:U2.3 MULTI-BUTTON-2:U2.4
MULTI-BUTTON-2:N$4
  Bottom 0.2: MULTI-BUTTON-2:R3.1 56.5,14.3 MULTI-BUTTON-2:U1.3 MULTI-BUTTON-2:U1.4
N$1  (via drill 0.35)
  Top 0.2: U$1.A10 44.01,24.76 44.01,23.37 44.52,22.86 44.52,20.53 44.67,20.38 44.67,16.23 44.5,16.05 36.3,16.05 36.02,16.33 v35.75,16.33
  Bottom 0.2: MULTI-BUTTON-1:R1.2 23.05,8.6 24.5,8.6 24.75,8.85 MULTI-BUTTON-1:U3.2 | MULTI-BUTTON-1:U1.2 MULTI-BUTTON-1:U1.1 42.6,8.1 37.1,8.1 MULTI-BUTTON-1:U2.2 | MULTI-BUTTON-1:U2.1 v35.75,16.33 35.75,15.94 35.55,15.73 35.55,15.03 35.27,14.75 35.27,13.8 35.75,13.32 MULTI-BUTTON-1:U2.2 | MULTI-BUTTON-1:U3.1 MULTI-BUTTON-1:U3.2 | MULTI-BUTTON-1:U2.2 31.42,9.45 30.07,10.8 28.43,10.8 27.08,9.45 MULTI-BUTTON-1:U3.2 | U$1.A10 42.85,27.9 MULTI-BUTTON-1:C1.2
N$2
  Bottom 0.2: MULTI-BUTTON-2:U2.2 58.75,22.05 MULTI-BUTTON-2:R1.2 53.85,22.05 MULTI-BUTTON-2:U1.1 46.3,21.75 | MULTI-BUTTON-2:U3.2 70.92,18.55 69.57,19.9 67.93,19.9 66.58,18.55 MULTI-BUTTON-2:U2.2 | MULTI-BUTTON-2:U3.1 70.92,9.45 69.57,8.1 67.93,8.1 66.58,9.45 MULTI-BUTTON-2:U2.1 MULTI-BUTTON-2:U2.2 | 46.3,21.75 MULTI-BUTTON-2:U1.2 | U$1.A11 40.31,27.86 MULTI-BUTTON-2:C1.2 41.18,28.05 42.13,29 43.87,29 46.37,26.5 46.37,21.82 46.3,21.75
N$3
  Bottom 0.2: DC-DC-6V.TRIM+ 16.5,37.05 R1.2
N$4  (via drill 0.35)
  Top 0.2: H-BRIDGE1:C1.2 6.55,18.93 v6.46,19.02
  Bottom 0.2: H-BRIDGE1:D7.C H-BRIDGE1:D6.C 17.55,27.05 17.55,24.18 17.37,24 15.5,24 14.6,23.1 F1.1 | H-BRIDGE1:D2.C 8.1,12 | 8.1,12 H-BRIDGE1:D3.C | 8.1,12 8.1,18.3 | v6.46,19.02 6.51,19.07
  Bottom 0.61: H-BRIDGE1:IC1.4 4.78,22.18 4.88,22.18 6.51,20.55 6.51,19.07 7.28,18.3 8.1,18.3 9.96,18.3 10.36,18.7 F1.1
N$17
  Top 0.2: T3.E 30.5,2.55 R15.1
N$18
  Top 0.2: T3.B 31,4.45 R19.2
N$21
  Top 0.2: T1.E 22.5,4.95 R17.1
N$22
  Top 0.2: T1.B 22,3.05 R16.2
SCL  (via drill 0.35)
  Top 0.2: U$1.19/A5 35.92,23.38 36.75,22.55 TOF_LP_D_AND_DISPLAY.4 36.75,17.84 37.58,17.01 v37.86,16.73 | v38.3,14 39.05,14.75 46.55,14.75 v46.7,14.6 46.77,14.68 46.77,19.6 47.62,20.45 TOF_PINCE.4 | TOF_LP_G.4 87.85,13.4 83.3,13.4 83.1,13.6 v51.3,13.6
  Bottom 0.2: v37.86,16.73 37.86,16.23 38.43,15.65 38.43,14.13 v38.3,14 | v46.7,14.6 47.22,14.08 49.83,14.08 50.31,13.6 v51.3,13.6
SDA  (via drill 0.35)
  Top 0.2: TOF_LP_D_AND_DISPLAY.3 35.5,18.13 v36.9,16.73 | U$1.18/A4 32.69,22.76 32.4,22.47 32.4,16.7 35.02,14.08 v35.95,14.08 37.42,14.08 38.49,15.15 45.82,15.15 v46.1,15.43 46.38,15.71 TOF_PINCE.3 | TOF_LP_G.3 84.14,14 83.98,13.84 83.42,13.84 83.26,14 51.9,14 v51.3,14.6
  Bottom 0.2: v36.9,16.73 36.43,16.26 36.43,16.05 35.95,15.57 v35.95,14.08 | v46.1,15.43 46.25,15.28 46.98,15.28 47.78,14.48 51.18,14.48 v51.3,14.6
SERIAL_AX12
  Top 0.2: U$1.9 U$1.10 25.55,38.14 R2.2 Q1.2
SERIAL_AX12_5V  (via drill 0.35)
  Top 0.2: R3.2 26.5,30.05 Q1.3 27.7,33.1 28.07,33.1 28.4,33.43 28.4,38.02 28.59,38.21 28.59,39.71 v28.3,40
  Bottom 0.2: v28.3,40 29.96,41.66 29.96,45.11 30.55,45.7 33.91,45.7 35.61,44 AX12_G.DATA
SERIAL_XL320
  Top 0.2: U$1.7 U$1.8 30.55,38.22 R6.2 Q2.2
SERIAL_XL320_5V  (via drill 0.35)
  Top 0.2: R7.2 31.5,30.05 Q2.3 31.8,32.2 v32.7,32.2 | XL320_G.DATA 84.5,28.48 79.67,33.3 54.3,33.3 49.49,38.11 49.49,40.01 48.7,40.8 43.43,40.8 41.23,43 XL320_G1.DATA 36.79,39.29 36.79,37.06 36.45,36.72 36.45,32.35 v36.3,32.2
  Bottom 0.2: v32.7,32.2 v36.3,32.2
TOF_LP_D  (via drill 0.35)
  Top 0.2: v22.25,16.25 22.25,15.26 22.95,14.55 30.85,14.55 31.1,14.3 31.1,13.4 31.5,13 37.69,13 38.19,12.5 v38.5,12.5 | TOF_LP_D_AND_DISPLAY.5 38,20.13 37.82,19.95 37.82,18.11 v38.57,17.36
  Bottom 0.2: v38.57,17.36 38.57,16.08 39.03,15.62 39.03,13.55 38.85,13.37 38.85,12.85 v38.5,12.5 | U$1.13 22.25,21.12 v22.25,16.25
TOF_LP_G  (via drill 0.35)
  Top 0.2: U$1.2 46.37,39.6 48.34,39.6 49.09,38.85 49.09,37.94 54.13,32.9 79.51,32.9 84.1,28.31 84.1,22.87 83.45,22.22 83.45,14.77 v83.7,14.52 | v86.8,11.5 TOF_LP_G.5
  Bottom 0.2: v83.7,14.52 86.72,11.5 v86.8,11.5
TOF_PINCE_EXT  (via drill 0.35)
  Top 0.2: v49.55,13.4 50.12,13.97 TOF_PINCE.6 | v48.2,13.4 38.66,13.4 38.58,13.32 38.02,13.32 37.94,13.4 31.7,13.4 31.5,13.6 31.5,14.46 31.02,14.95 30.78,14.95 v30.5,15.23
  Bottom 0.2: v48.2,13.4 v49.55,13.4 | U$1.17/A3 30.15,19.82 30.25,19.72 30.25,15.48 v30.5,15.23
TOF_PINCE_INT  (via drill 0.35)
  Top 0.2: v34.9,11.8 47.9,11.8 48.88,12.78 TOF_PINCE.5
  Bottom 0.2: U$1.14/A0 22.53,22.94 25.75,19.72 25.75,13.35 27.3,11.8 v34.9,11.8

## Text on the board
tDocu: M | TOF LPD | TOF PINCE | TOF LPG | GYRO